# Altium PCB PSU2.PcbDoc
Units mm, origin at the board's own origin, x right, y up, seen from the top; angles counter-clockwise.
Board outline 60.32 x 53.97 mm, 2 copper layers (Top Layer, Bottom Layer); 21 components, 8 nets, 51 pads, 3 vias.
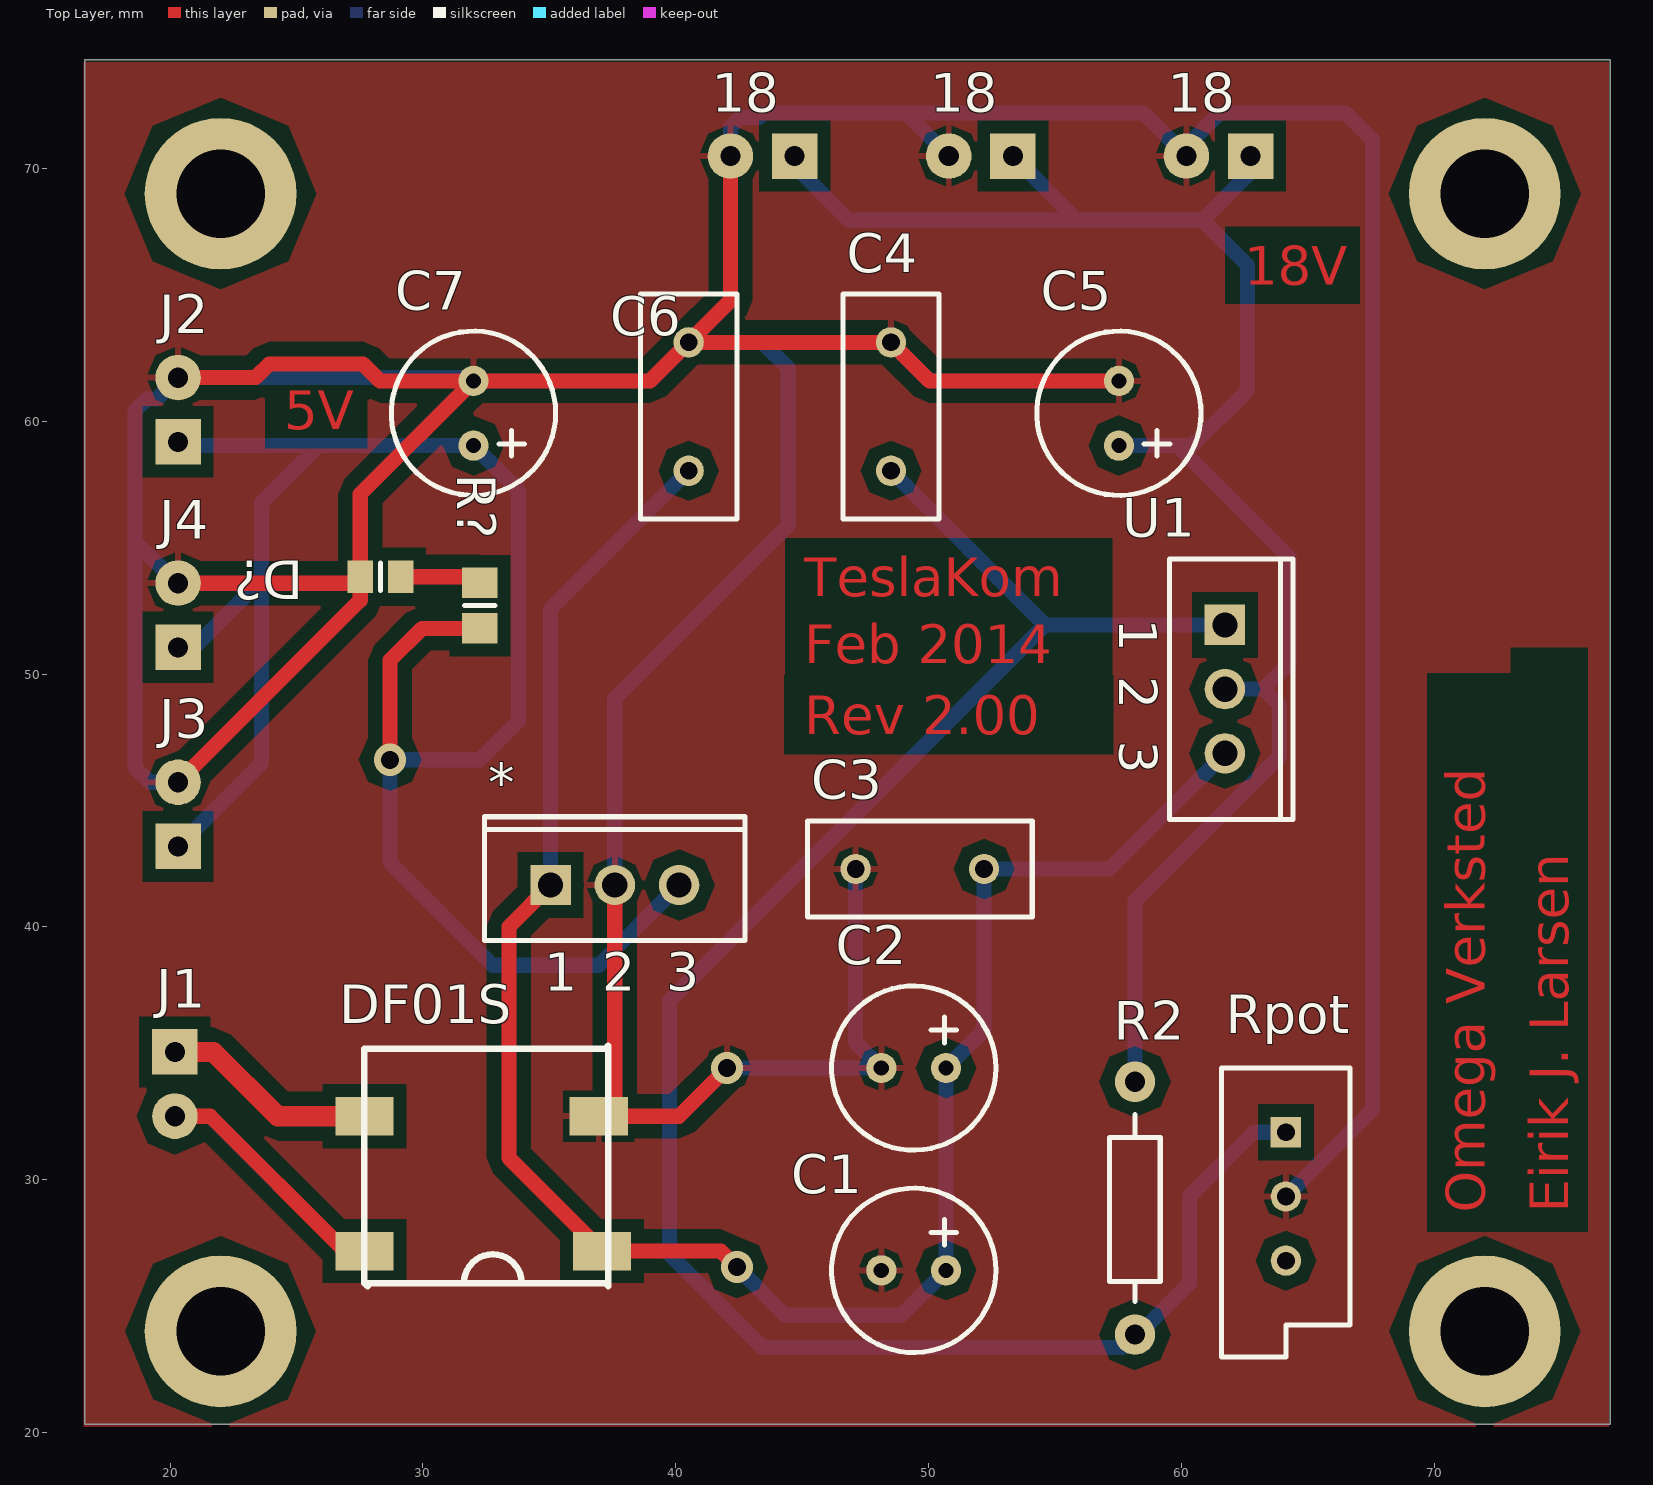
[diagram p0: Top Layer view]
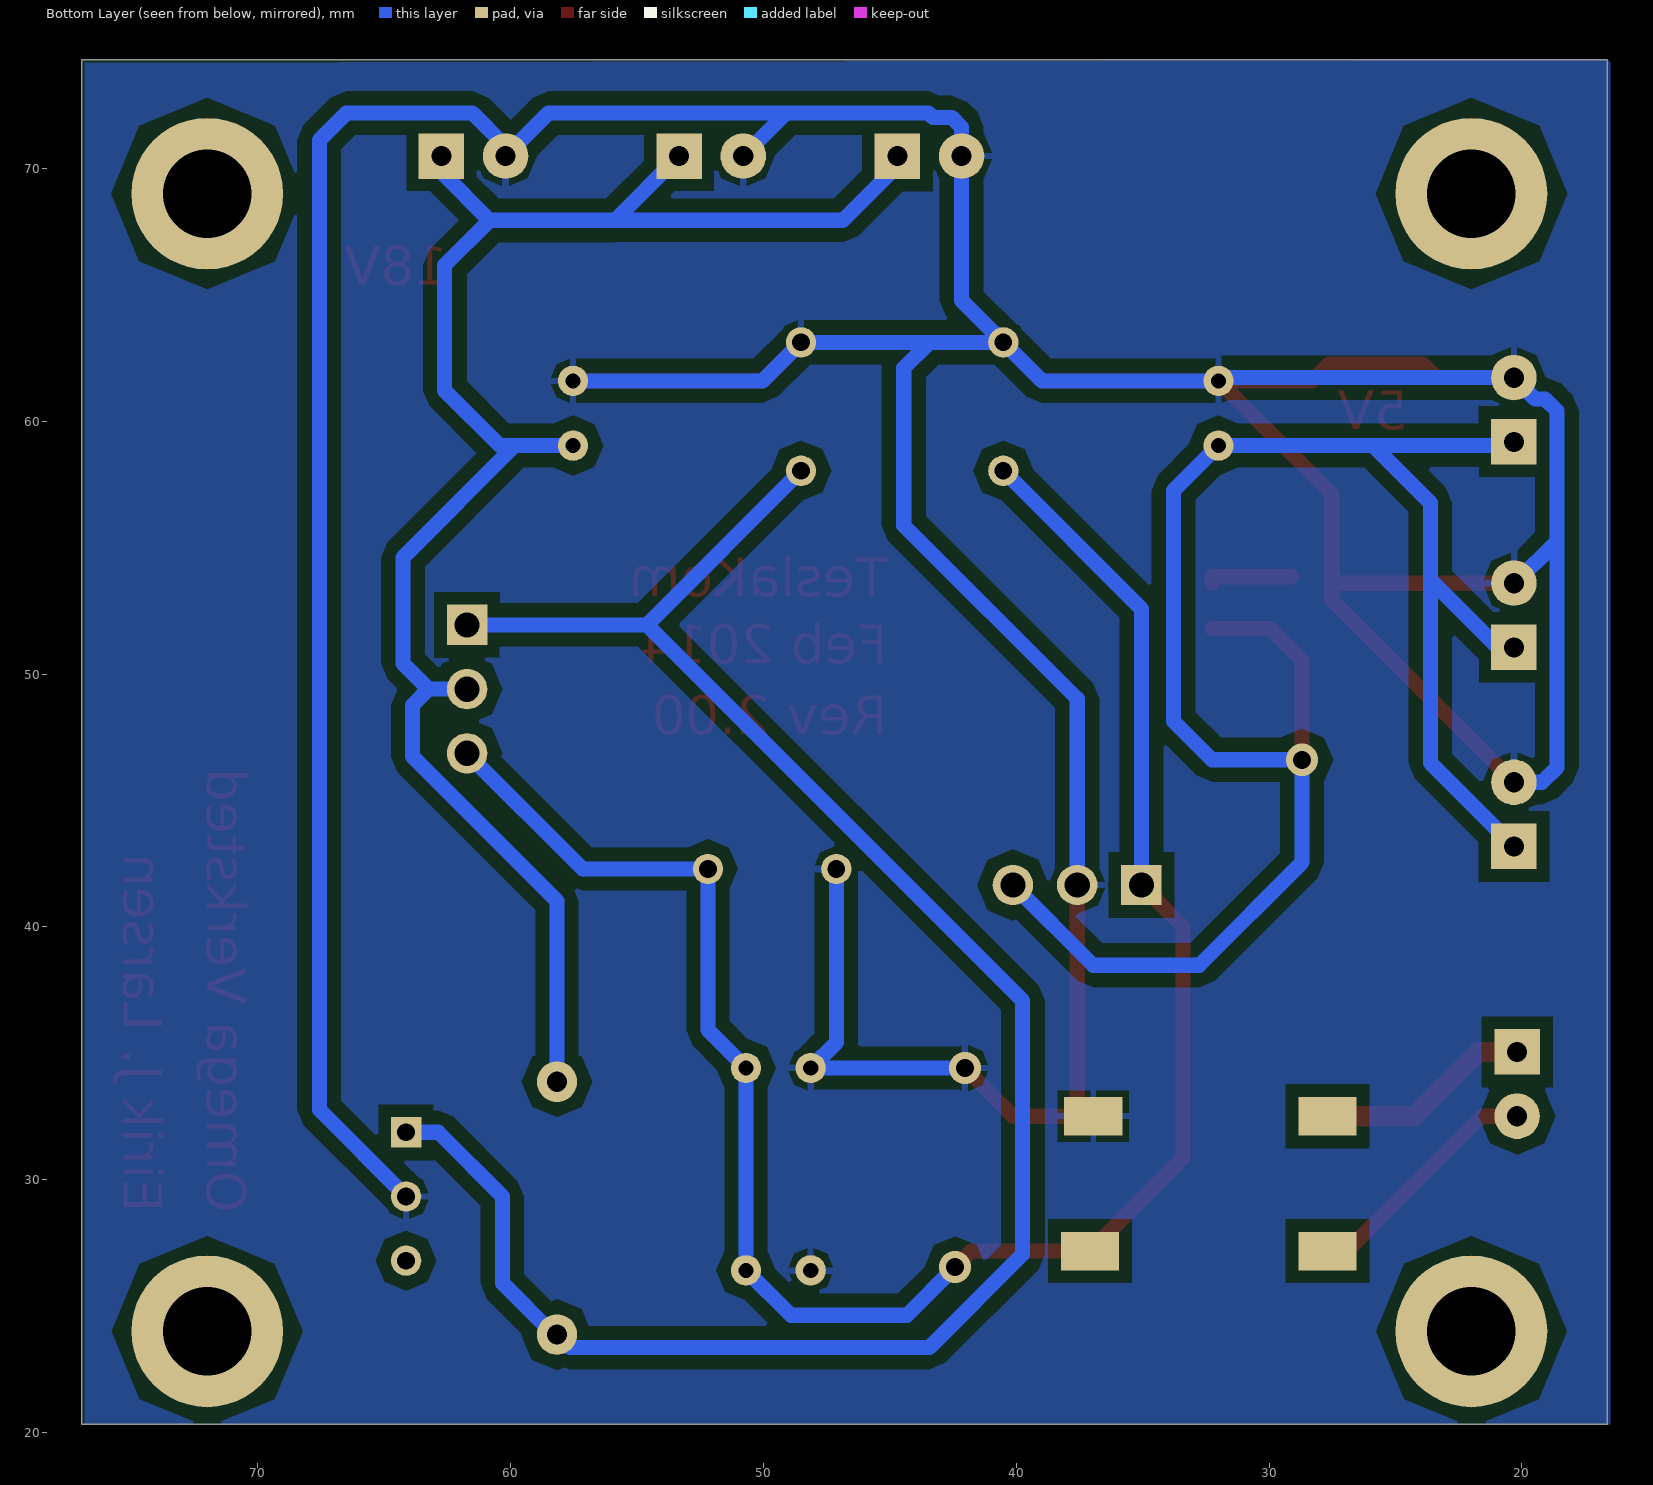
[diagram p1: Bottom Layer view, seen from below]

## Layer stack, top to bottom
Top Layer: signal copper 0.0356
Dielectric: dielectric 0.32, FR-4, Dk 4.8
Bottom Layer: signal copper 0.0356

## Board outline
16.637,74.295 16.637,20.32 76.835,20.32 76.962,20.32 76.962,74.295

## Design rules (kind name [scope] priority, off if disabled: settings)
Clearance [All] p1: gap=0.5
PolygonConnect [All] p1: connectstyle=Relief reliefconductorwidth=0.254 reliefentries=4 polygonreliefangle="90 Angle" airgapwidth=0.254
RoutingVias [All] p1: holewidth=0.9 width=1.6 viastyle="Through Hole" minholewidth=0.8 minwidth=1.27 maxholewidth=1 maxwidth=1.6
SolderMaskExpansion [All] p1: expansion=0.102
Width [All] p1: maxlimit=0.9 minlimit=0.3 preferedwidth=0.6
28 further rules are at their usual default settings.

## Components (designator, comment, footprint, x,y, rotation, side; value= is the part's Value field where it differs from the comment)
18 "18V out" "JST 2pin" 53.34,70.485 r90 top
18 "18V out" "JST 2pin" 44.704,70.485 r90 top
18 "18V out" "JST 2pin" 62.738,70.485 r90 top
* "LM7805" 221A-06 37.592,41.656 r0 top
C1 "100U" "CAP 2.5mm" 48.133,26.416 r0 top
C2 "100U" "CAP 2.5mm" 48.133,34.417 r0 top
C3 "100N" RAD-0.2 49.657,42.291 r0 top
C4 "100N" RAD-0.2 48.514,60.579 r270 top
C5 "100U" "CAP 2.5mm" 57.531,61.595 r270 top
C6 "100N" RAD-0.2 40.513,60.579 r270 top
C7 "100U" "CAP 2.5mm" 32.004,61.595 r270 top
D? "LED2" 6-0805_L 28.321,53.848 r180 top
DF01S "DF01S" DF01S_PCB 27.051,27.178 r0 top
J1 "PWR Input" "JST 2pin" 20.193,35.052 r180 top
J2 "5V out" "JST 2pin" 20.32,59.182 r0 top
J3 "5V out" "JST 2pin" 20.32,43.18 r0 top
J4 "5V out" "JST 2pin" 20.32,51.054 r0 top
R2 "3K3" "Axial 1/4W" 58.166,23.876 r90 top
R? "470" 6-0805_N 32.258,52.705 r270 top
Rpot "RPot" VR5 64.135,29.337 r270 top
U1 "LM317T" 221A-06 61.722,49.403 r270 top

## Footprints (in the part's own frame and the unit in brackets; to place one, negate y for a bottom-side part, rotate by r counter-clockwise, add the part's x,y. Pads: shape width x height; smd on the part's side, far side on the other; paste and mask are expansions set on the pad)
6-0805_L [mm] "Chip Resistor, Body 2.0x1.2mm, IPC High Density"
  rect 1x1.3 smd: 1(-0.8,0) 2(0.8,0)
  silkscreen extent 0,-0.55 0,0.55, body extent -1.07,-0.7 1.07,0.7, height 0.7
6-0805_N [mm] "Chip Resistor, Body 2.0x1.2mm, IPC Medium Density"
  rect 1.2x1.4 smd: 1(-0.9,0) 2(0.9,0)
  silkscreen extent 0,-0.6 0,0.6, body extent -1.07,-0.7 1.07,0.7, height 0.7
221A-06 [mm] "TO, Thru-Hole, Vertical, Heatsink Mounted; 3 In-Line Leads; Pitch 2.54 mm"
  rect 1.6x1.6 hole 1: 1(-2.54,0)
  round 1.6 hole 1: 2(0,0) 3(2.54,0)
  silkscreen extent -5.15,-2.2 5.15,2.7
"Axial 1/4W" [mm]
  round 1.6 hole 0.8: 1(0,0) 2(10,0)
  silkscreen extent 1.3,-1 8.7,1
"CAP 2.5mm" [mm]
  round 1.2 hole 0.6: 1(0,0) 2(2.56,0)
  silkscreen extent -1.97,-3.25 4.53,3.25
DF01S_PCB [mil] "Likeretterbro"
  rect 90.55x60 all layers, no hole: 1(25,0) 2(25,210) 3(395,0) 4(390,210)
  silkscreen extent 25,-55 405,320, body extent 25,-50 405,320, height 157
"JST 2pin" [mm]
  rect 1.8x1.8 hole 0.8: 1(0,0)
  round 1.8 hole 0.8: 2(0,2.54)
RAD-0.2 [mm] "Radial Cap, Thru-Hole; 2 Leads; 0.2 in Pin Spacing"
  round 1.2 hole 0.7: 1(-2.54,0) 2(2.54,0)
  silkscreen extent -4.44,-1.91 4.44,1.91
VR5 [mm] "Thru-Hole; 3 Leads"
  rect 1.2x1.2 hole 0.7: 1(-2.54,0)
  round 1.2 hole 0.7: 2(0,0) 3(2.54,0)
  silkscreen extent -5.08,-2.54 6.35,2.54

## Part data
18 18 18 J1 J2 J3 J4: library part "JST 2pin"
C1 C2 C3 C4 C5 C6 C7: library part CAP
D?: "Typical RED, GREEN, YELLOW, AMBER GaAs LED"
DF01S: "Likeretterbro"
R2 R?: library part R
Rpot: "Potentiometer"
U1: "Three-Terminal Adjustable Output Positive Voltage Regulator"

## Free pads (board coordinates)
  round 6 hole 3.5: 0(72,24) 1(22,69) 1(72,69) 3(22,24)

## Via types
v1: diameter 1.27, hole 0.711, Top Layer to Bottom Layer, 3 vias

## Nets (pads, with @x,y where several pads share a name; then routed paths per layer and width w, separated by ;. In a path a pad name is that pad's centre, name@x,y a point inside that pad or via, vN(x,y) a via of type N, cw(c..) or ccw(c..) an arc to the next point about the centre after c; other vN are vias at no path point)
5V: *.3 C7.2 J2.1 J3.1 J4.1 R?.2 | length 78.2
  Top Layer w0.6: v1(28.702,46.609) 28.702,50.546 29.961,51.805 R?.2
  Bottom Layer w0.6: J3.1 23.622,46.482 23.622,53.721 ; J4.1 20.955,51.054 23.622,53.721 ; J2.1 20.467,59.035 25.888,59.035 ; *.3 36.957,38.481 32.766,38.481 28.702,42.545 v1(28.702,46.609) 32.258,46.609 33.782,48.133 33.782,57.257 C7.2 25.888,59.035 ; 23.622,53.721 23.622,56.769 25.888,59.035
18V: 18.1 C5.2 R2.2 U1.2 | length 69.3
  Bottom Layer w0.6: 18.1@44.704,70.485 44.704,70.104 46.863,67.945 55.88,67.945 ; 18.1@53.34,70.485 55.88,67.945 ; C5.2 59.837,59.035 ; R2.2 58.166,41.021 63.881,46.736 63.881,48.768 63.246,49.403 ; U1.2 63.246,49.403 ; 18.1@62.738,70.485 62.738,69.85 60.833,67.945 ; 55.88,67.945 60.833,67.945 ; 59.837,59.035 60.432,59.035 62.611,61.214 62.611,66.167 60.833,67.945 ; 59.837,59.035 64.262,54.61 64.262,50.419 63.246,49.403
GND: 18.2 *.2 C1.1 C2.1 C3.1 C4.1 C5.1 C6.1 C7.1 D?.2 DF01S.4 J2.2 J3.2 J4.2 Rpot.2 | length 271.2
  Top Layer w0.6: J3.2 27.521,52.921 D?.2 ; J4.2 27.267,53.594 D?.2 ; J2.2 23.38,61.722 23.926,62.268 27.636,62.268 28.308,61.595 C7.1 ; *.2 37.592,33.147 DF01S.4 40.132,32.512 v1(42.037,34.417) ; 18.2@42.164,70.485 42.164,64.77 C6.1 ; C5.1 50.038,61.595 C4.1 C6.1 ; D?.2 27.521,57.112 C7.1 ; C7.1 38.989,61.595 C6.1
  Bottom Layer w0.6: J3.2 19.206,45.72 18.62,46.306 18.62,55.245 ; J4.2 20.271,53.594 18.62,55.245 ; *.2 37.592,49.022 44.45,55.88 44.45,62.103 43.434,63.119 ; v1(42.037,34.417) C2.1 47.117,35.433 C3.1 ; 18.2@50.8,70.485 49.1,72.185 ; C5.1 50.038,61.595 C4.1 43.434,63.119 ; Rpot.2 67.564,32.766 67.564,71.12 66.499,72.185 61.507,72.185 60.198,70.876 60.198,70.485 58.498,72.185 49.1,72.185 ; 18.62,55.245 18.62,60.413 19.089,60.882 19.48,60.882 J2.2 31.877,61.722 C7.1 38.989,61.595 C6.1 ; C6.1 43.434,63.119 ; C6.1 42.164,64.77 42.164,70.485 42.164,71.628 42.545,72.009 43.297,72.009 43.473,72.185 49.1,72.185
NetC4_2: C4.2 R2.1 Rpot.1 U1.1 | length 78.2
  Bottom Layer w0.6: C4.2 54.61,51.943 ; U1.1 54.61,51.943 ; Rpot.1 62.865,31.877 60.325,29.337 60.325,25.908 58.293,23.876 R2.1 57.658,23.368 43.434,23.368 39.751,27.051 39.751,37.084 54.61,51.943
NetD?_1: D?.1 R?.1 | length 3.4
  Top Layer w0.6: D?.1 32.258,53.848 R?.1
NetDF01S_1: DF01S.1 J1.2 | length 9.7
  Top Layer w0.6: J1.2 21.59,32.512 26.924,27.178 DF01S.1
NetDF01S_2: DF01S.2 J1.1 | length 8.5
  Top Layer w0.8: J1.1 21.717,35.052 24.257,32.512 DF01S.2
VIN: *.1 C1.2 C2.2 C3.2 C6.2 DF01S.3 U1.3 | length 78.6
  Top Layer w0.6: *.1 33.401,40.005 33.401,30.861 DF01S.3 41.783,27.178 v1(42.418,26.543)
  Bottom Layer w0.6: *.1 35.052,52.578 C6.2 ; v1(42.418,26.543) 44.323,24.638 48.915,24.638 C1.2 C2.2 52.197,35.921 C3.2 57.15,42.291 U1.3
pads on no net: Rpot.3

## Polygon pours and split planes (outlines as drawn)
GND on Top Layer "Top Layer-No Net" (solid, pour order 10): 16.58,74.2 16.58,20.225 77.032,20.225 76.905,20.225 76.905,74.2
GND on Bottom Layer "Top Layer-No Net" (solid, pour order 12): 16.51,74.295 16.51,20.32 76.835,20.32 76.835,74.168

## Other copper
Top Layer:
  text "18V" at 62.484,65.405 h1.52
  text "5V" at 24.511,59.69 h1.52
  text "TeslaKom" at 45.085,53.086 h1.52
  text "Feb 2014" at 45.085,50.419 h1.52
  text "Rev 2.00" at 45.085,47.625 h1.52
  text "Omega Verksted" at 72.009,28.702 h1.52 r90
  text "Eirik J. Larsen" at 75.311,28.702 h1.52 r90

## Text inside footprints (layer, text, board x,y; h text height)
*: Top Overlay "1" at 34.802,37.481 h1.5; Top Overlay "2" at 37.092,37.481 h1.5; Top Overlay "3" at 39.632,37.481 h1.5
U1: Top Overlay "1" at 57.547,52.193 h1.5 r270; Top Overlay "2" at 57.547,49.903 h1.5 r270; Top Overlay "3" at 57.547,47.363 h1.5 r270